# Altium PCB Controller R2.PcbDoc (part 1 of 3)
Units mil, origin at the board's own origin, x right, y up, seen from the top; angles counter-clockwise.
Board outline 3149.61 x 3149.61 mil, 4 copper layers (Top Layer, Inner 1, Inner 2, Bottom Layer), stack 70.112 mil thick; 128 components, 120 nets, 594 pads, 1557 vias.
Unrouted connection lines stored in the file: 130.
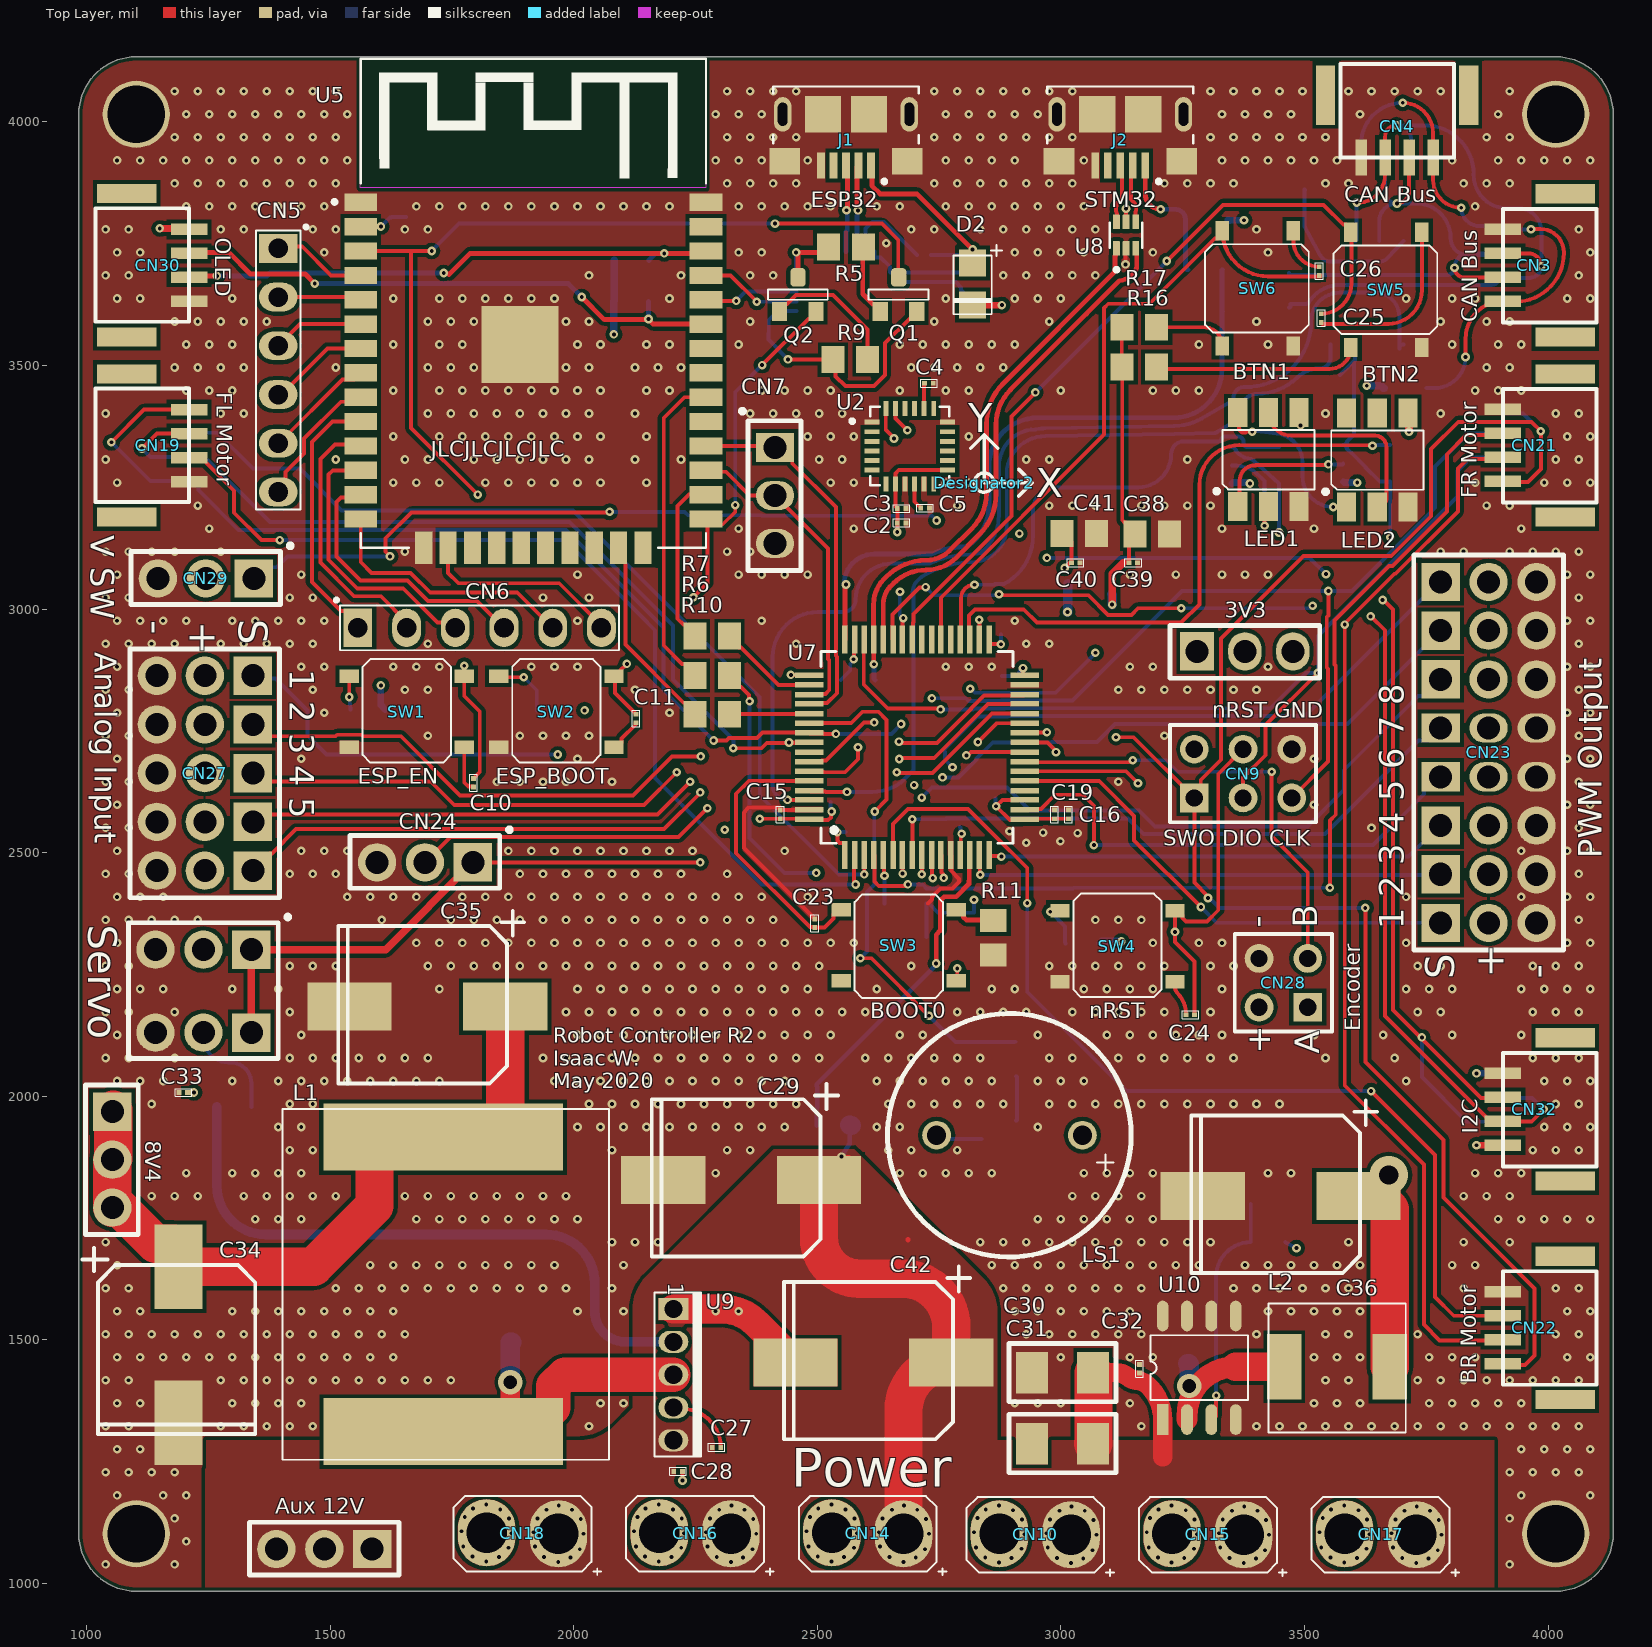
[diagram p0: Top Layer view]
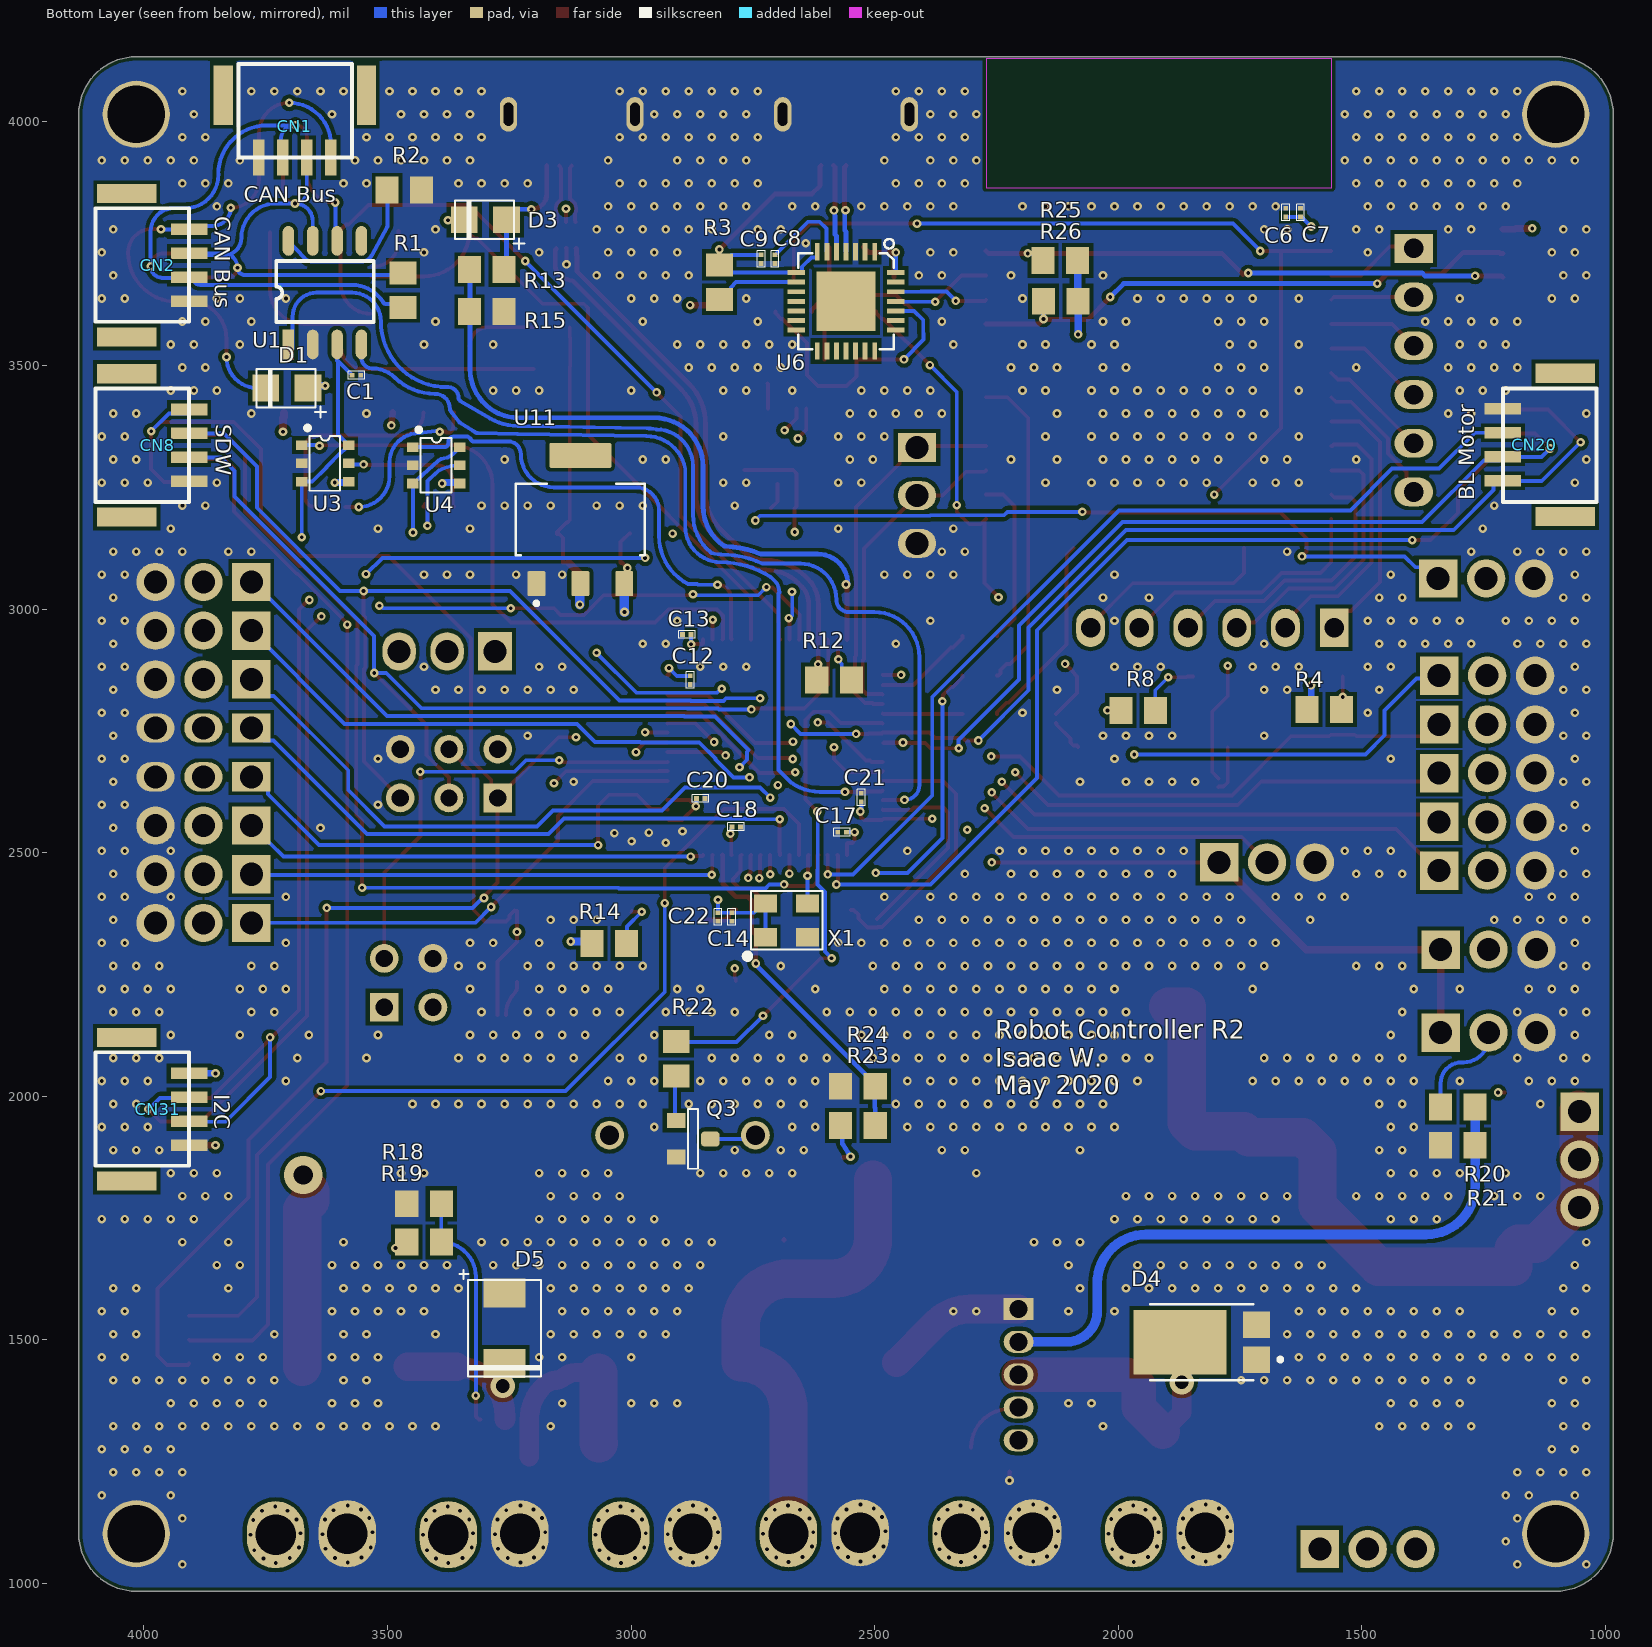
[diagram p1: Bottom Layer view, seen from below]
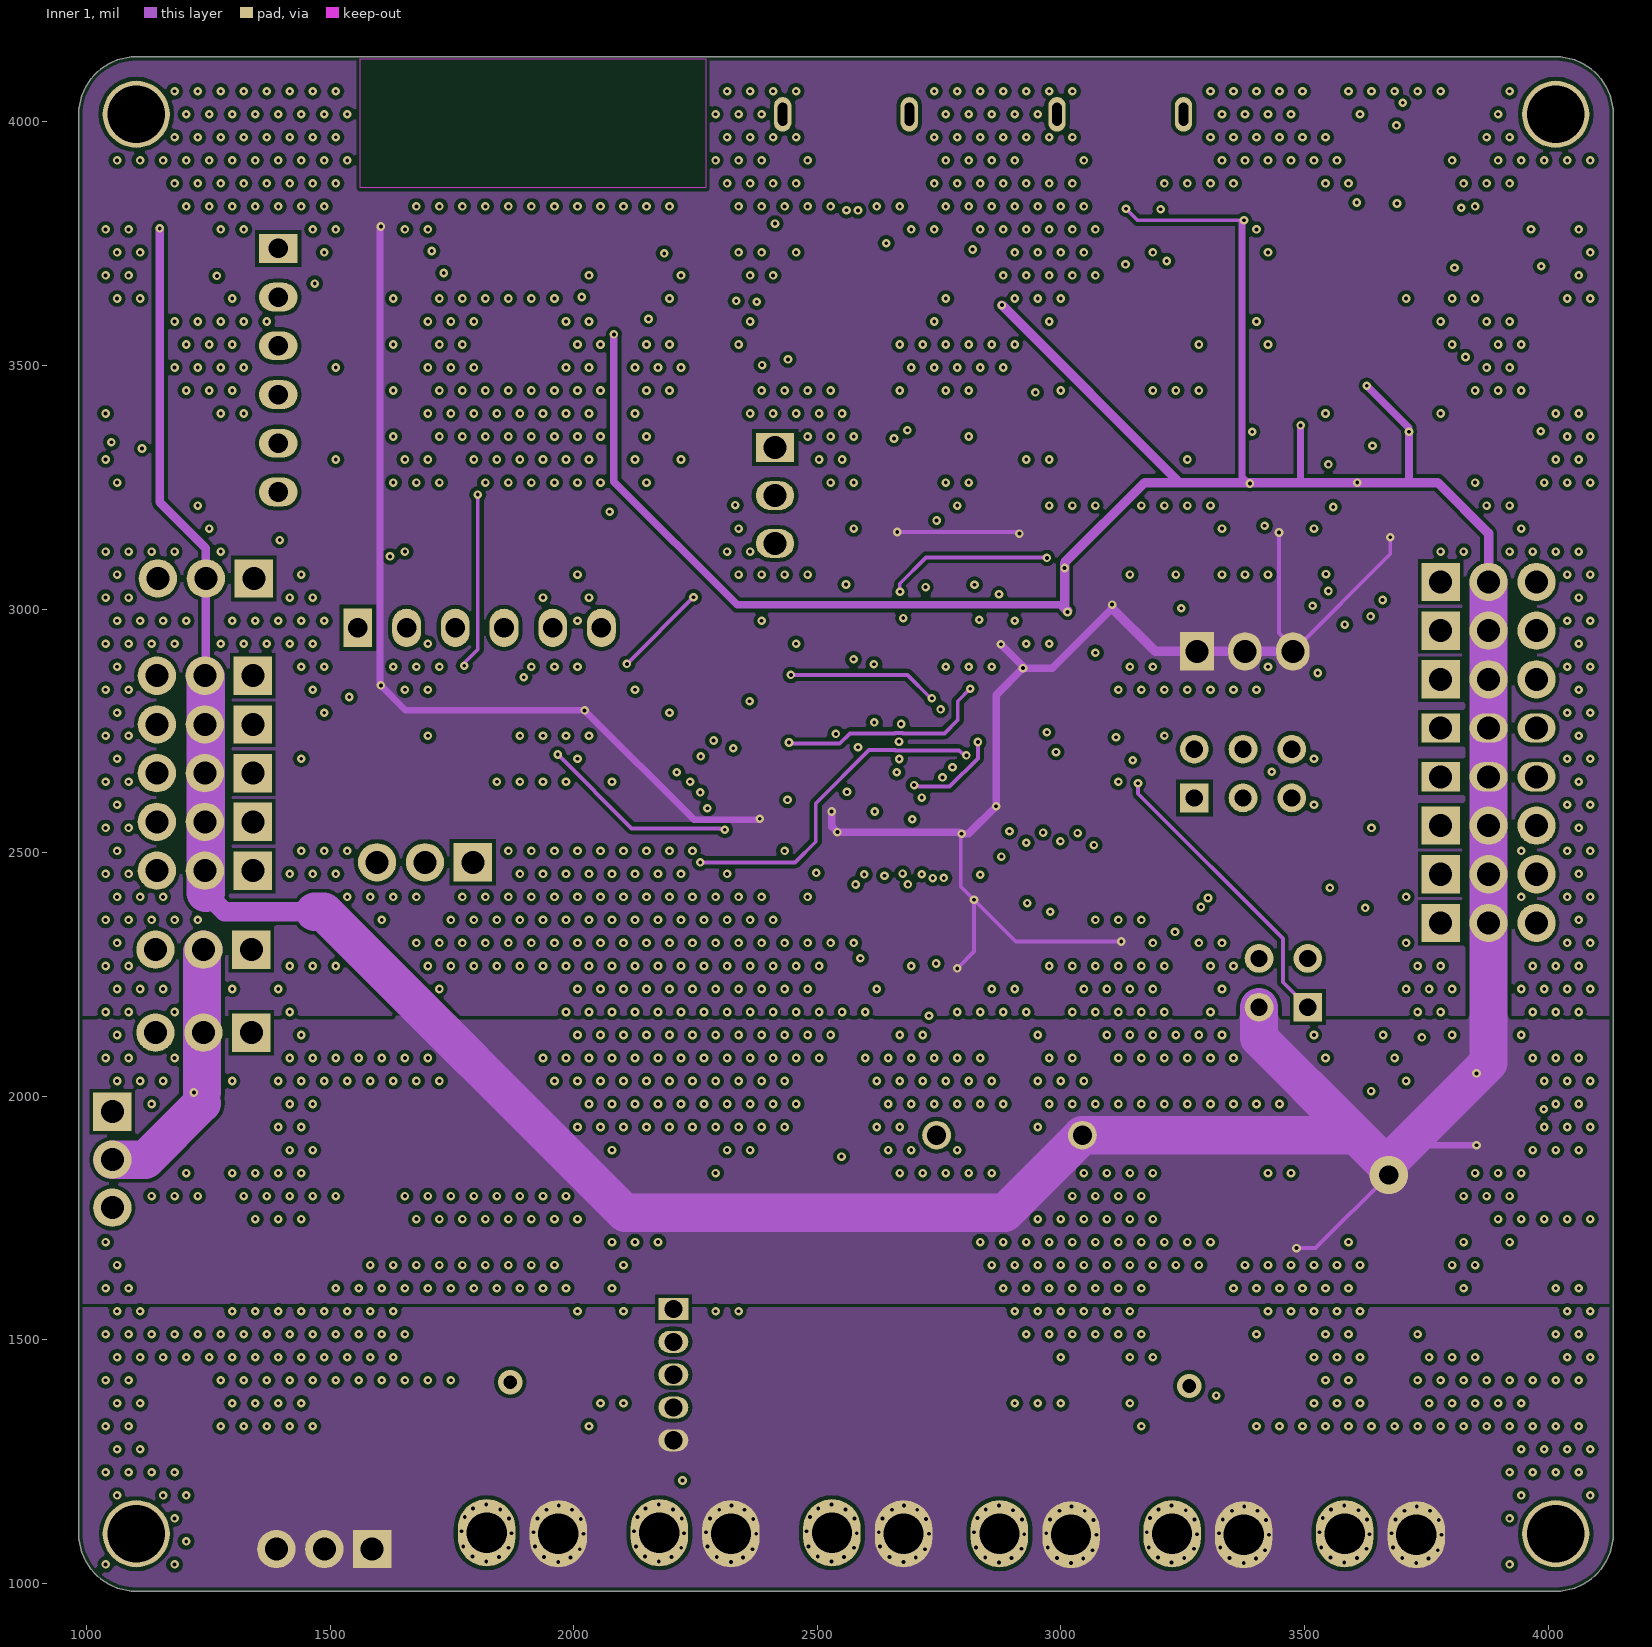
[diagram p2: Inner 1]
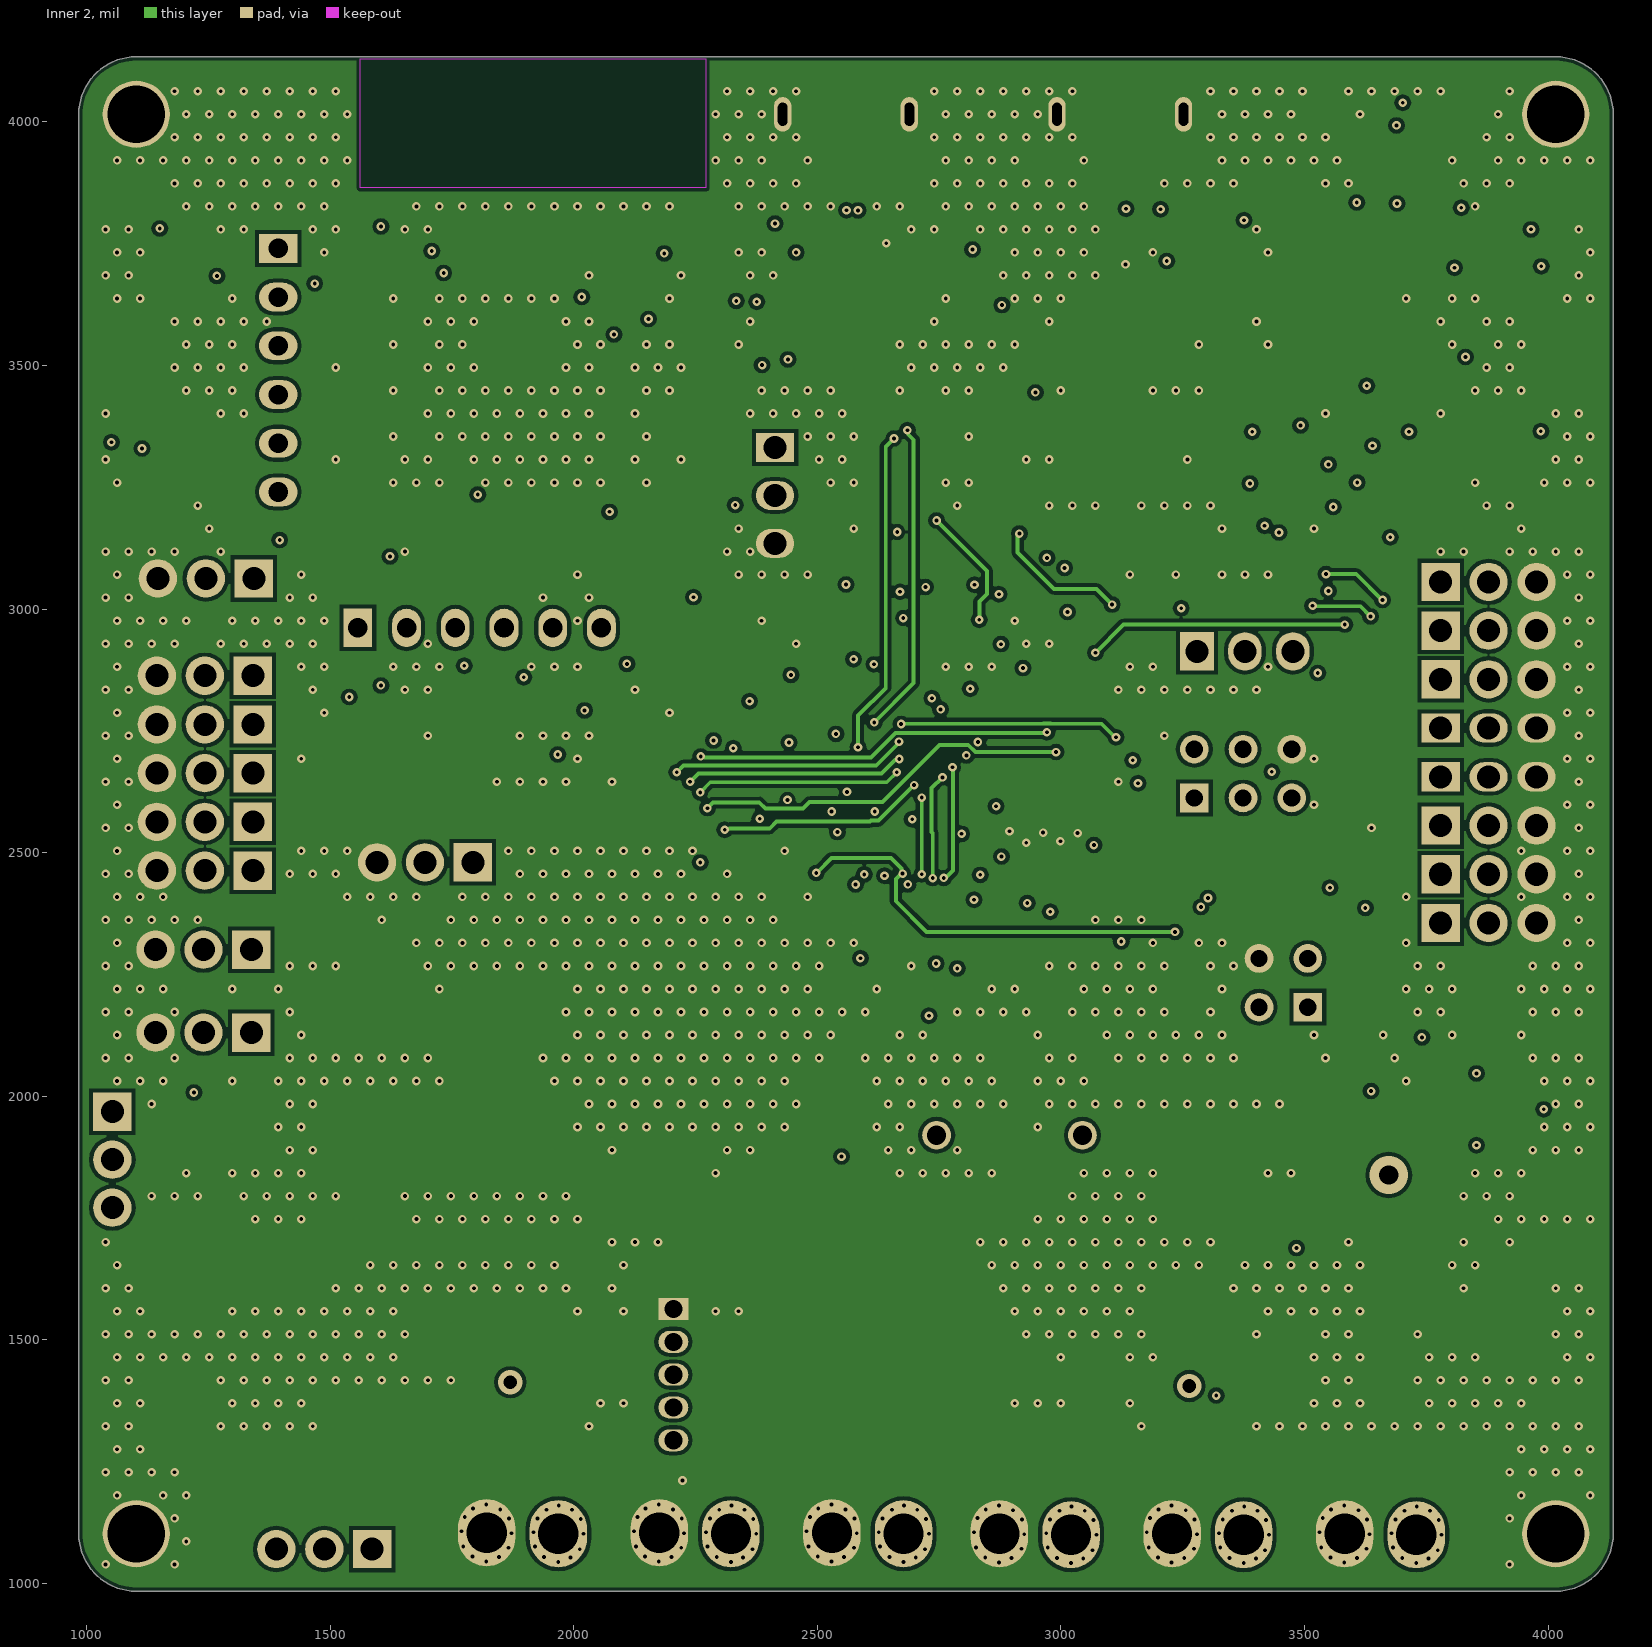
[diagram p3: Inner 2]

## Layer stack, top to bottom
Top Solder: solder mask 1, SM-001, Dk 4
Top Layer: signal copper 1.378
Dielectric 2: prepreg 2.8, PP-006, Dk 4.1
Inner 1: signal copper 1.378
Dielectric 1: core 59, Core-043, Dk 4.3
Inner 2: signal copper 1.378
Dielectric 3: prepreg 2.8, PP-006, Dk 4.1
Bottom Layer: signal copper 1.378
Bottom Solder: solder mask 1, SM-001, Dk 4

## Board outline
984.25,1102.36 984.25,4015.75 cw(c1102.36,4015.75) 1102.36,4133.86 4015.75,4133.86 cw(c4015.75,4015.75) 4133.86,4015.75 4133.86,1102.36 cw(c4015.75,1102.36) 4015.75,984.25 1102.36,984.25 cw(c1102.36,1102.36)

## Design rules (kind name [scope] priority, off if disabled: settings)
BoardOutlineClearance [All] p1: gap=7.87 ignorepadtopadclearanceinfootprint=FALSE except(15.75: Arc-SplitBarrior Arc-SplitContinuation Track-SplitBarrior Track-SplitContinuation SMDPad-SplitBarrior SMDPad-SplitContinuation THPad-SplitBarrior THPad-SplitContinuation Via-SplitBarrior Via-SplitContinuation Fill-SplitBarrior Fill-SplitContinuation Poly-SplitBarrior Poly-SplitContinuation Region-SplitBarrior Region-SplitContinuation Text-SplitBarrior Text-SplitContinuation)
Clearance "Clearance Bottom Layer" [OnLayer('Bottom Layer')] p1: gap=8 ignorepadtopadclearanceinfootprint=TRUE except(10: Arc-Text Track-Text SMDPad-Text THPad-Text Via-Text Fill-Text Poly-Text Region-Text Text-Text)
Clearance "Clearance Top Layer" [OnLayer('Top Layer')] p2: gap=8 ignorepadtopadclearanceinfootprint=TRUE except(10: Arc-Text Track-Text SMDPad-Text THPad-Text Via-Text Fill-Text Poly-Text Region-Text Text-Text)
Clearance [All] p3: gap=7.87 ignorepadtopadclearanceinfootprint=FALSE except(3.5: Arc-Arc Arc-Track Arc-SMDPad Track-Track Track-SMDPad SMDPad-SMDPad; 5: Arc-Via Track-Via SMDPad-Via THPad-Via Via-Via; 10: Arc-Text Track-Text SMDPad-Text THPad-Text Via-Text Fill-Text Poly-Text Region-Text Text-Text)
DiffPairsRouting [All] p1: maxlimit=10 minlimit=8 mostfreqgap=10 toplayer_minwidth=7.99 toplayer_maxwidth=15 toplayer_prefwidth=8.27 midlayer1_minwidth=7.99 midlayer1_maxwidth=15 midlayer1_prefwidth=8.27 midlayer2_minwidth=7.99 midlayer2_maxwidth=15 midlayer2_prefwidth=8.27 bottomlayer_minwidth=7.99 bottomlayer_maxwidth=15 bottomlayer_prefwidth=8.27 maxuncoupledlength=500
HoleSize [All] p1: absolutevalues=TRUE maxlimit=248.03 minlimit=7.87 maxpercent=80.000 minpercent=20.000
MinimumAnnularRing [All] p1: minimumring=3
MinimumSolderMaskSliver [All] p1: minsoldermaskwidth=3.94
PlaneConnect [All] p1: planeconnectstyle=Direct reliefexpansion=20 reliefentries=4 reliefconductorwidth=10 reliefairgap=10
PolygonConnect PolygonConnect_1 [All] p1: connectstyle=Direct reliefconductorwidth=20 reliefentries=4 polygonreliefangle="90 Angle" airgapwidth=10
RoutingCorners [All] p1: cornerstyle=Round minsetback=100 maxsetback=100
RoutingVias [All] p1: holewidth=19.68 width=39.37 viastyle="Through Hole" minholewidth=7.87 minwidth=17.72 maxholewidth=39.37 maxwidth=78.74
SilkToSilkClearance [All] p1: silktosilkclearance=3.94
SilkToSolderMaskClearance [IsPad] p1: minsilkscreentomaskgap=3.94 clearancetoexposedcopper=TRUE
SolderMaskExpansion [All] p1: expansion=4 istentingtop=FALSE
Width [All] p1: maxlimit=196.85 minlimit=8 preferedwidth=9.84
23 further rules are at their usual default settings.

## Classes and differential pairs
component class U_Power: C27 C28 C29 C30 C31 C32 C33 C34 C35 C36 C38 C39 C40 C41 C42 CN10 CN14 CN15 CN16 CN17 CN18 D4 D5 L1 L2 R18 R19 R20 U9 U10 U11
component class U_MCU: C6 C7 C8 C9 C10 C11 C12 C13 C14 C15 C16 C17 C18 C19 C20 C21 C22 C23 C24 C25 C26 CN5 CN6 CN7 CN8 CN9 D2 D3 J1 J2 Q1 Q2 R3 R4 R5 R6 R7 R8 R9 R10 R11 R12 R13 R14 R15 R16 R17 SW1 SW2 SW3 SW4 SW5 SW6 U5 U6 U7 U8 X1
component class U_LED: LED1 LED2 U3 U4
component class U_IMU: C2 C3 C4 C5 U2
component class U_CAN: C1 CN1 CN2 CN3 CN4 D1 R1 R2 U1
component class "Controller R2": CN19 CN20 CN21 CN22 CN23 CN24 CN27 CN28 CN29 CN30 CN31 CN32 LS1 Q3 R22 R23 R24
differential pair USB: +USB_P -USB_N
differential pair NO_ESD: +NO_ESD_P -NO_ESD_N
differential pair ESP_USB: +ESP_USB_P -ESP_USB_N

## Components (designator, comment, footprint, x,y, rotation, side; value= is the part's Value field where it differs from the comment)
C1 "Cap" 0402 3563.98,3480.32 r0 bottom locked value=100nF
C2 "Cap" 0402 2673.23,3177.17 r180 top locked value=1uF
C3 "Cap" 0402 2673.23,3206.69 r180 top locked value=100nF
C4 "Cap" 0402 2729.33,3463.58 r180 top locked value=2.2nF
C5 "Cap" 0402 2721.46,3207.68 r180 top locked value=100nF
C6 "ESP32_P1" 0402 1656.5,3813.98 r270 bottom locked value=1uF
C7 "ESP32_P1" 0402 1625.98,3813.98 r270 bottom locked value=100nF
C8 "P6" 0402 2704.72,3718.5 r90 bottom locked value=100nF
C9 "P7" 0402 2733.27,3718.5 r90 bottom locked value=100nF
C10 "Cap" 0402 1794.29,2643.7 r90 top locked value=100nF
C11 "Cap" 0402 2127.95,2775.59 r90 top locked value=100nF
C12 "Pin 32" 0402 2878.94,2854.33 r90 bottom locked value=100nF
C13 "Pin 33" 0402 2885.83,2947.83 r180 bottom locked value=100nF
C14 "XO" 0402 2793.31,2368.11 r90 bottom locked value=100nF
C15 "" 0402 2424.21,2578.74 r270 top locked value=1uF
C16 "" 0402 3015.75,2578.74 r270 top value=1uF
C17 "Pin 1" 0402 2566.93,2542.32 r180 bottom locked value=100nF
C18 "Pin 13" 0402 2784.45,2553.15 r0 bottom locked value=100nF
C19 "Pin 17" 0402 2987.2,2578.74 r270 top value=100nF
C20 "Pin 19" 0402 2857.28,2611.22 r0 bottom value=100nF
C21 "Pin 64" 0402 2527.56,2613.19 r270 bottom locked value=100nF
C22 "XO" 0402 2821.85,2368.11 r90 bottom locked value=10nF
C23 "Cap" 0402 2495.08,2355.31 r90 top locked value=100nF
C24 "Cap" 0402 3265.75,2167.32 r0 top locked value=100nF
C25 "Cap" 0402 3534.45,3597.44 r90 top locked value=100nF
C26 "Cap" 0402 3530.51,3693.9 r270 top locked value=100nF
C27 "Cap" 0402 2293.31,1279.53 r180 top locked value=1uF
C28 "Cap" 0402 2214.57,1230.32 r180 top locked value=1uF
C29 "470uF" 10x12mm-Electrolytic 2333.66,1828.74 r0 top locked
C30 "Cap" 1206 3003.44,1433.07 r0 top locked value=47uF
C31 "Cap" 1206 3003.44,1287.4 r0 top locked value=47uF
C32 "Cap" 0402 3161.42,1440.94 r270 top locked value=100nF
C33 "Cap" 0402 1198.82,2007.87 r0 top locked value=1uF
C34 "470uF" 10x12mm-Electrolytic 1188.98,1480.32 r90 top locked
C35 "470uF" 10x12mm-Electrolytic 1689.96,2184.06 r0 top locked
C36 "100uF" 10x12mm-Electrolytic 3440.94,1795.28 r0 top locked
C38 "Cap" "0805 - duplicate" 3187.99,3154.53 r180 top locked value=4.7uF
C39 "Cap" 0402 3148.62,3095.47 r180 top locked value=100nF
C40 "Cap" 0402 3030.51,3095.47 r180 top locked value=100nF
C41 "Cap" "0805 - duplicate" 3037.4,3155.51 r180 top locked value=4.7uF
C42 "470uF" 10x12mm-Electrolytic 2605.32,1453.74 r0 top locked
CN1 "JST_GH-4P" JST_GH-4P 3764.31,3927.12 r90 bottom locked
CN2 "JST_GH-4P" JST_GH-4P 3907.44,3631.89 r0 bottom locked
CN3 "JST_GH-4P" JST_GH-4P 3907.44,3779.53 r0 top locked
CN4 "JST_GH-4P" JST_GH-4P 3616.31,3927.12 r90 top locked
CN5 "6P-2.5mm" 6-Pin-Header 1393.7,3740.55 r0 top locked
CN6 "6P-2.5mm" 6-Pin-Header 1557.09,2961.61 r90 top locked
CN7 "3P-2.5mm" 2.5mm-3P#1 2413.39,3331.69 r0 top locked
CN8 "JST_GH-4P" JST_GH-4P 3907.44,3262.2 r0 bottom locked
CN9 "SWD" HDR2X3_CEN 3274.02,2612.6 r0 top locked
CN10 "Power In" Power_Leads 2974.02,1102.36 r180 top locked
CN14 "JST_Leads_In" Power_Leads 2630.17,1104.36 r180 top locked
CN15 "JST_Leads_In" Power_Leads 3328.35,1102.36 r180 top locked
CN16 "JST_Leads_In" Power_Leads 2275.83,1104.36 r180 top locked
CN17 "JST_Leads_In" Power_Leads 3682.68,1102.36 r180 top locked
CN18 "JST_Leads_In" Power_Leads 1921.5,1104.36 r180 top locked
CN19 "JST_GH-4P" JST_GH-4P 1210.67,3261.98 r180 top locked
CN20 "JST_GH-4P" JST_GH-4P 1210.68,3411.25 r180 bottom locked
CN21 "JST_GH-4P" JST_GH-4P 3907.44,3409.98 r0 top locked
CN22 "JST_GH-4P" JST_GH-4P 3907.43,1598.95 r0 top locked
CN23 "8P-Signal-2.5mm" 8ch-signal-header 3779.53,2355.91 r90 top locked
CN24 "3P-2.5mm" 2.5mm-3P#2 1793.31,2480.32 r270 top locked
CN27 "5P-Signal-2.5mm" 5ch-signal-header 1341.54,2863.39 r270 top locked
CN28 "Header 2X2" HDR2X2 3506.89,2183.07 r90 top locked
CN29 "3P-2.5mm" 2.5mm-3P#2 1343.5,3062.99 r270 top locked
CN30 "JST_GH-4P" JST_GH-4P 1210.67,3631.89 r180 top locked
CN31 "JST_GH-4P" JST_GH-4P 3907.44,1899.61 r0 bottom locked
CN32 "JST_GH-4P" JST_GH-4P 3907.44,2047.24 r0 top locked
D1 "SS12F" SMAF_DIODE 3706.69,3453.74 r0 bottom locked
D2 "SS12F" SMAF_DIODE 2818.9,3667.32 r270 top locked
D3 "SS12F" SMAF_DIODE 3299.21,3799.21 r0 bottom locked
D4 "Diode" PowerDi5 1828.98,1495.28 r90 bottom locked
D5 "SS24" DO-214AA 3259.84,1524.04 r90 bottom locked
Designator2 "Comment" XY_Arrow 2842.52,3259.84 r0 top locked
J1 "10118193-0001LF" FCI_10118193-0001LF 2559.06,4015.75 r180 top locked
J2 "10118193-0001LF" FCI_10118193-0001LF 3122.05,4015.75 r180 top locked
L1 "47uH 8A" 18x16-9-Inductor 1732.28,1614.17 r90 top locked
L2 "22uH" 71x66-Inductor 3566.93,1444.88 r0 top locked
LED1 "APA102C" 5x5_WS2812 3363.19,3210.63 r90 top locked
LED2 "APA102C" 5x5_WS2812 3586.61,3209.65 r90 top locked
LS1 "Buzzer" 12-dia-buzzer 3044.29,1920.28 r180 top locked
Q1 "S8050" SOT23-FET 2629.32,3611.1 r90 top locked
Q2 "S8050" SOT23-FET 2422.63,3611.1 r90 top locked
Q3 "S8050" SOT23-FET 2907.6,1950.4 r180 bottom locked
R1 "120" "0805 - duplicate" 3468.5,3654.53 r90 bottom locked
R2 "100" "0805 - duplicate" 3465.55,3860.24 r0 bottom locked
R3 "10k" "0805 - duplicate" 2818.9,3671.26 r270 bottom locked
R4 "10k" "0805 - duplicate" 1577.76,2794.29 r180 bottom locked
R5 "10k" "0805 - duplicate" 2559.06,3743.11 r0 top locked
R6 "0R" "0805 - duplicate" 2284.45,2864.17 r0 top locked
R7 "1k" "0805 - duplicate" 2284.45,2944.88 r0 top locked
R8 "10k" "0805 - duplicate" 1959.65,2792.32 r180 bottom locked
R9 "10k" "0805 - duplicate" 2567.91,3512.8 r0 top locked
R10 "1k" "0805 - duplicate" 2284.45,2784.45 r0 top locked
R11 "10k" "0805 - duplicate" 2861.22,2325.79 r90 top locked
R12 "1.5k" "0805 - duplicate" 2583.66,2854.33 r0 bottom locked
R13 "10k" "0805 - duplicate" 3296.26,3696.85 r180 bottom locked
R14 "10k" "0805 - duplicate" 3045.28,2313.98 r180 bottom locked
R15 "15k" "0805 - duplicate" 3296.26,3611.22 r0 bottom locked
R16 "10k" "0805 - duplicate" 3161.42,3497.05 r0 top locked
R17 "10k" "0805 - duplicate" 3161.42,3578.74 r0 top locked
R18 "3.3k" "0805 - duplicate" 3425.2,1779.53 r0 bottom locked
R19 "10k" "0805 - duplicate" 3425.2,1700.79 r0 bottom locked
R20 "10k" "0805 - duplicate" 1303.15,1978.35 r0 bottom locked
R21 "1.74k" "0805 - duplicate" 1303.15,1899.61 r180 bottom locked
R22 "1.5k" "0805 - duplicate" 2907.48,2076.77 r90 bottom locked
R23 "5k" "0805 - duplicate" 2534.45,1939.96 r180 bottom locked
R24 "1k" "0805 - duplicate" 2534.45,2020.67 r0 bottom locked
R25 "1.2k" "0805 - duplicate" 2119.09,3715.55 r180 bottom locked
R26 "1.2k" "0805 - duplicate" 2118.11,3631.89 r180 bottom locked
SW1 "SPST Switch" 4.8x4.8-SMD-SWITCH 1539.37,2862.2 r0 top locked
SW2 "SPST Switch" 4.8x4.8-SMD-SWITCH 1846.46,2862.2 r0 top locked
SW3 "SPST Switch" 4.8x4.8-SMD-SWITCH 2785.43,2237.2 r180 top locked
SW4 "SPST Switch" 4.8x4.8-SMD-SWITCH 2998.03,2380.91 r0 top locked
SW5 "USR_BTN2" 4.8x4.8-SMD-SWITCH 3595.47,3537.4 r90 top locked
SW6 "USR_BTN1" 4.8x4.8-SMD-SWITCH 3331.69,3540.35 r90 top locked
U1 "SN65HVD230" SOIC8-TI_CAN 3703.54,3543.31 r90 bottom locked
U2 "MPU-6050" QFN50P400X400X95-24N 2689.96,3334.65 r0 top locked
U3 "PI4ULS5V201" SOT23-PI4ULS5V201 3676.18,3336.61 r180 bottom locked
U4 "PI4ULS5V201" SOT23-PI4ULS5V201 3447.83,3332.68 r180 bottom locked
U5 "ESP-WROOM-32" ESP-WROOM-32 1917.32,3510.04 r0 top locked
U6 "CP2102-GMR" QFN28G_0.5-5X5MM 2559.06,3631.89 r270 bottom locked
U7 "STM32F373RCTx" LQFP64 2704.72,2716.54 r90 top locked
U8 "USBLC6-2P6" SOT50P160X60-6N 3133.86,3767.72 r90 top locked
U9 "XL4016" TO220-5L 2204.72,1563.39 r0 top locked
U10 "XL1509-ADJ" SOP8-MT3420 3209.06,1336.61 r90 top locked
U11 "AMS1117-3.3" SOT229P700X180-4N 3104.33,3184.06 r180 bottom locked
X1 "8MHz 3225 SMD Oscillator" "3.2x2.5 SMD" 2724.41,2395.67 r180 bottom locked

## Footprints (in the part's own frame and the unit in brackets; to place one, negate y for a bottom-side part, rotate by r counter-clockwise, add the part's x,y. Pads: shape width x height; smd on the part's side, far side on the other; paste and mask are expansions set on the pad)
2.5mm-3P#1 [mm]
  rect 2x1.5 hole 1.2: 1(0,0)
  oval 2x1.5 hole 1.2: 2(0,-2.5) 3(0,-5)
  silkscreen extent -1.8,-6.4 1.35,2
2.5mm-3P#2 [mm]
  rect 2x2 hole 1.2: 1(0,0)
  round 2 hole 1.2: 2(0,-2.5) 3(0,-5)
  silkscreen extent -1.8,-6.4 1.35,2
"3.2x2.5 SMD" [mm]
  rect 1.2x0.95 smd: 1(0,-1.75) 2(2.2,-1.75) 3(2.2,0) 4(0,0)
  silkscreen extent -1.11,-2.91 2.97,0.66
4.8x4.8-SMD-SWITCH [mm]
  rect 1x0.7 smd: 1(0,0) 2(6,0) 3(0,-3.7) 4(6,-3.7)
  silkscreen extent 0.7,-4.5 5.3,0.9
5ch-signal-header [mm]
  rect 2x2 hole 1.2: 1(0,0) 2(2.54,0) 3(5.08,0) 4(7.62,0) 5(10.16,0)
  round 2 hole 1.2: N(0,-5) N(2.54,-5) N(5.08,-5) N(7.62,-5) N(10.16,-5) P(0,-2.5) P(2.54,-2.5) P(5.08,-2.5) P(7.62,-2.5) P(10.16,-2.5)
  silkscreen extent -1.4,-6.4 11.58,1.4
5x5_WS2812 [mm]
  rect 1.5x1 smd: 1(0,0) 2(0,-1.6) 3(0,-3.2) 4(4.9,-3.2) 5(4.9,-1.6) 6(4.9,0)
  silkscreen extent 0.7,-4 4,1.2
6-Pin-Header [mm]
  rect 2x1.5 hole 1.02: 1(0,0)
  oval 2x1.5 hole 1.02: 2(0,-2.54) 3(0,-5.08) 4(0,-7.62) 5(0,-10.16) 6(0,-12.7)
  silkscreen extent -1.17,-13.61 1.5,1.17
8ch-signal-header [mm]
  rect 2x2 hole 1.2: 1(0,0) 2(2.54,0) 3(5.08,0) 6(12.7,0) 7(15.24,0) 8(17.78,0)
  rect 1.524x2 hole 1.2: 4(7.62,0) 5(10.16,0)
  round 2 hole 1.2: N(0,-5) N(2.54,-5) N(5.08,-5) N(12.7,-5) N(15.24,-5) N(17.78,-5) P(0,-2.5) P(2.54,-2.5) P(5.08,-2.5) P(12.7,-2.5) P(15.24,-2.5) P(17.78,-2.5)
  oval 1.524x2 hole 1.2: N(7.62,-5) N(10.16,-5) P(7.62,-2.5) P(10.16,-2.5)
  silkscreen extent -1.4,-6.4 19.18,1.4
10x12mm-Electrolytic [mm]
  rect 4.4x2.5 smd: 1(4.318,0) 2(-3.81,0)
  silkscreen extent -4.4,-4 5.3,5
12-dia-buzzer [mm]
  round 1.5 hole 1: A(0,0) K(7.6,0)
  silkscreen extent -2.54,-6.35 10.16,6.35
18x16-9-Inductor [mm]
  rect 3.5x12.5 smd: 1(-7.675,0) 2(7.675,0)
  silkscreen extent -9.14,-8.64 9.14,8.38
71x66-Inductor [mm]
  rect 1.8x3.4 smd: 1(-2.75,0) 2(2.75,0)
  silkscreen extent -3.58,-3.43 3.58,3.3
0402 [mm]
  rect 0.25x0.25 smd mask+0.05: 1(-0.225,0) 2(0.225,0)
  silkscreen extent -0.43,-0.2 0.43,0.2
"0805 - duplicate" [mm] "Chip Resistor, Body 2.0x1.2mm, IPC Medium Density"
  rect 1.2x1.4 smd: 1(-0.9,0) 2(0.9,0)
  body extent -1.07,-0.7 1.07,0.7, height 0.7
1206 [mil]
  rect 65x85 smd: 1(-62.5,0) 2(62.5,0)
  silkscreen extent -110,-60 110,60
DO-214AA [mm]
  rect 1.52x2.18 smd: A(1.84,0) K(-1.839,0)
  silkscreen extent -2.51,-1.91 3.05,2.36
ESP-WROOM-32 [mm]
  rect 1.7x0.9 smd: 1(-9,8.255) 2(-9,6.985) 3(-9,5.715) 4(-9,4.445) 5(-9,3.175) 6(-9,1.905) 7(-9,0.635) 8(-9,-0.635) 9(-9,-1.905) 10(-9,-3.175) 11(-9,-4.445) 12(-9,-5.715) 13(-9,-6.985) 14(-9,-8.255) 25(9,-8.255) 26(9,-6.985) 27(9,-5.715) 28(9,-4.445) 29(9,-3.175) 30(9,-1.905) 31(9,-0.635) 32(9,0.635) 33(9,1.905) 34(9,3.175) 35(9,4.445) 36(9,5.715) 37(9,6.985) 38(9,8.255)
  rect 4x4 smd: 1(-0.7,0.845)
  rect 0.9x1.7 smd: 15(-5.715,-9.755) 16(-4.445,-9.755) 17(-3.175,-9.755) 18(-1.905,-9.755) 19(-0.635,-9.755) 20(0.635,-9.755) 21(1.905,-9.755) 22(3.175,-9.755) 23(4.445,-9.755) 24(5.715,-9.755)
  Keep-Out Layer region: -9.026,15.75 9,15.75 9,9.026 -9.026,9.026
  Keep-Out Layer region: -9.012,15.75 9,15.75 9,9.012 -9.012,9.012
  Keep-Out Layer region: -9.024,15.75 9,15.75 9,9.024 -9.024,9.024
  Keep-Out Layer region: -9.026,15.75 9,15.75 9,9.026 -9.026,9.026
  Keep-Out Layer region: -9.012,15.75 9,15.75 9,9.012 -9.012,9.012
  Keep-Out Layer region: -9.024,15.75 9,15.75 9,9.024 -9.024,9.024
  Keep-Out Layer region: -9.026,15.75 9,15.75 9,9.026 -9.026,9.026
  Keep-Out Layer region: -9.012,15.75 9,15.75 9,9.012 -9.012,9.012
  Keep-Out Layer region: -9.024,15.75 9,15.75 9,9.024 -9.024,9.024
  silkscreen extent -10.46,-9.75 9,15.75
FCI_10118193-0001LF [mm]
  rect 0.4x1.35 smd: 1(-1.3,2.675) 2(-0.65,2.675) 3(0,2.675) 4(0.65,2.675) 5(1.3,2.675)
  oval 0.9x1.8 hole 0.5 slot 1.2 at 90 deg: S(-3.3,0) S(3.3,0)
  rect 1.6x1.4 smd: S(-3.2,2.45) S(3.2,2.45)
  rect 1.9x1.9 smd: S(-1.2,0) S(1.2,0)
  silkscreen extent -3.8,-1.45 3.8,3.6
HDR2X2 [mm] "Connector; Header; 2x2 Position"
  rect 1.5x1.5 hole 0.9: 1(0,0)
  round 1.5 hole 0.9: 2(0,2.54) 3(2.54,0) 4(2.54,2.54)
  silkscreen extent -1.27,-1.27 3.81,3.81
HDR2X3_CEN [mm] "Connector; Header; 3x2 Position"
  rect 1.5x1.5 hole 0.9: 1(0,0)
  round 1.5 hole 0.9: 2(2.54,0) 3(5.08,0) 4(0,2.54) 5(2.54,2.54) 6(5.08,2.54)
  silkscreen extent -1.27,-1.27 6.35,3.81
JST_GH-4P [mm]
  rect 1.9x0.6 smd: 1(0,-3.75) 2(0,-2.5) 3(0,-1.25) 4(0,0)
  rect 3.1x1 smd: 5(3.251,-5.613) 5(3.251,1.854)
  silkscreen extent 0,-4.85 4.88,1.07
LQFP64 [mil]
  rect 58x11 smd: 1(-221,148) 2(-221,128) 3(-221,108) 4(-221,89) 5(-221,69) 6(-221,49) 7(-221,30) 8(-221,10) 9(-221,-10) 10(-221,-30) 11(-221,-49) 12(-221,-69) 13(-221,-89) 14(-221,-108) 15(-221,-128) 16(-221,-148) 33(221,-148) 34(221,-128) 35(221,-108) 36(221,-89) 37(221,-69) 38(221,-49) 39(221,-30) 40(221,-10) 41(221,10) 42(221,30) 43(221,49) 44(221,69) 45(221,89) 46(221,108) 47(221,128) 48(221,148)
  rect 11x58 smd: 17(-148,-221) 18(-128,-221) 19(-108,-221) 20(-89,-221) 21(-69,-221) 22(-49,-221) 23(-30,-221) 24(-10,-221) 25(10,-221) 26(30,-221) 27(49,-221) 28(69,-221) 29(89,-221) 30(108,-221) 31(128,-221) 32(148,-221) 49(148,221) 50(128,221) 51(108,221) 52(89,221) 53(69,221) 54(49,221) 55(30,221) 56(10,221) 57(-10,221) 58(-30,221) 59(-49,221) 60(-69,221) 61(-89,221) 62(-108,221) 63(-128,221) 64(-148,221)
  silkscreen extent -197,-197 197,197
Power_Leads [mm]
  oval 3x3.5 hole 2.1: A(-1.194,0.051) K(2.54,0)
  silkscreen extent -3.43,-1.91 4.27,2.21
PowerDi5 [mm]
  rect 1.39x1.4 smd: 1(-0.92,-2.856) 2(0.92,-2.856)
  rect 3.36x4.86 smd: 3(0,1.126)
  silkscreen extent -1.98,-4.2 1.98,2.69
QFN28G_0.5-5X5MM [mm]
  rect 0.9x0.254 smd: 1(-2.59,1.5) 2(-2.59,1) 3(-2.59,0.5) 4(-2.59,0) 5(-2.59,-0.5) 6(-2.59,-1) 7(-2.59,-1.5) 15(2.59,-1.5) 16(2.59,-1) 17(2.59,-0.5) 18(2.59,0) 19(2.59,0.5) 20(2.59,1) 21(2.59,1.5)
  rect 0.254x0.9 smd: 8(-1.5,-2.59) 9(-1,-2.59) 10(-0.5,-2.59) 11(0,-2.59) 12(0.5,-2.59) 13(1,-2.59) 14(1.5,-2.59) 22(1.5,2.59) 23(1,2.59) 24(0.5,2.59) 25(0,2.59) 26(-0.5,2.59) 27(-1,2.59) 28(-1.5,2.59)
  rect 3.1x3.1 smd paste-3: 29(0,0)
  silkscreen extent -3.25,-2.5 2.5,2.5
QFN50P400X400X95-24N [mm]
  rect 0.79x0.26 smd mask+0.089: 1(-1.97,1.25) 2(-1.97,0.75) 3(-1.97,0.25) 4(-1.97,-0.25) 5(-1.97,-0.75) 6(-1.97,-1.25) 13(1.97,-1.25) 14(1.97,-0.75) 15(1.97,-0.25) 16(1.97,0.25) 17(1.97,0.75) 18(1.97,1.25)
  rect 0.26x0.79 smd mask+0.089: 7(-1.25,-1.97) 8(-0.75,-1.97) 9(-0.25,-1.97) 10(0.25,-1.97) 11(0.75,-1.97) 12(1.25,-1.97) 19(1.25,1.97) 20(0.75,1.97) 21(0.25,1.97) 22(-0.25,1.97) 23(-0.75,1.97) 24(-1.25,1.97)
  silkscreen extent -3.1,-2.05 2.05,2.05
SMAF_DIODE [mm]
  rect 1.4x1.4 smd: A(-1.1,0) K(1.1,0)
  silkscreen extent -2.03,-1 1.57,1.52
SOIC8-TI_CAN [mm]
  rect 1.55x0.6 smd: 1(0,0)
  oval 1.55x0.6 smd: 2(0,-1.27) 3(0,-2.54) 4(0,-3.81) 5(5.4,-3.81) 6(5.4,-2.54) 7(5.4,-1.27) 8(5.4,0)
  silkscreen extent 1.17,-4.44 4.34,0.63
SOP8-MT3420 [mm]
  rect 1.6x0.61 smd: 1(0,0)
  oval 1.6x0.61 smd: 2(0,-1.27) 3(0,-2.54) 4(0,-3.81) 5(5.4,-3.81) 6(5.4,-2.54) 7(5.4,-1.27) 8(5.4,0)
  silkscreen extent 1.02,-4.44 4.39,0.64
SOT23-FET [mil]
  rect 38.27x31.57 smd: 1(0,0) 2(0,-74.8)
  rrect50% 38.27x31.57 smd: 3(70,-38)
  silkscreen extent 24,-99 45,24
SOT23-PI4ULS5V201 [mm]
  rect 0.6x0.5 smd: 1(0,0) 2(0,-0.95) 3(0,-1.9) 4(2.45,-1.9) 5(2.45,-0.95) 6(2.45,0)
  silkscreen extent 0.2,-2.38 2,1
SOT50P160X60-6N [mm]
  rrect8% 0.75x0.35 smd: 1(-0.69,0.5) 2(-0.69,0) 3(-0.69,-0.5) 4(0.69,-0.5) 5(0.69,0) 6(0.69,0.5)
  silkscreen extent -1.9,-0.85 0.65,0.85
SOT229P700X180-4N [mm]
  rrect15% 0.93x1.31 smd: 1(-2.29,-3.345) 2(0,-3.345) 3(2.29,-3.345)
  rrect15% 3.24x1.31 smd: 4(0,3.345)
  silkscreen extent -3.36,-4.47 3.36,1.86
TO220-5L [mm]
  rect 1.56x1.15 hole 0.95: 1(0,0)
  oval 1.56x1.15 hole 0.95: 2(0,-1.71) 3(0,-3.42) 4(0,-5.13) 5(0,-6.84)
  silkscreen extent -0.99,-7.7 1.45,0.85
XY_Arrow [mil]
  silkscreen extent -28,-28 98,98

## Part data
C6 C7 C8 C9 C12 C13 C14 C15 C16 C17 C18 C19 C20 C21 C22: library part Cap, LatestRevisionDate=17-Jul-2002, LatestRevisionNote="Re-released for DXP Platform.", PackageDescription="Radial Cap, Thru-Hole; 2 Leads; 0.3 in Pin Spacing", PackageReference=RAD-0.3, Published=8-Jun-2000, Publisher="Altium Limited"
C29 C34 C35 C36 C42: library part "Polarised Capacitor"
CN9: library part "Header 3X2A", "Header, 3-Pin, Dual row", LatestRevisionDate=17-Jul-2002, LatestRevisionNote="Re-released for DXP Platform.", Publisher="Altium Limited"
CN10: library part JST_Leads_In
CN28: "Header, 2-Pin, Dual row", LatestRevisionDate=17-Jul-2002, LatestRevisionNote="Re-released for DXP Platform.", Publisher="Altium Limited"
D5: "2A Schottky Diode"
J1 J2: "USB - micro B USB 2.0 Receptacle Connector 5 Position Surface Mount, Right Angle; Through Hole", Package=None, Availability=Unavailable, MF="Amphenol ICC", MP=10118193-0001LF, Price=None, SnapEDA_Link=https://www.snapeda.com/parts/10118193-0001LF/Amphenol%20FCI/view-part/2758989/?ref=snap
L1: library part "SMD Inductor 18x16.9", "TMPC1707"
L2: library part "22uH Inductor, 7.1*6.6"
Q1 Q2 Q3: Package="TO-18-3 NJS", Digi-Key_Part_Number=1086-15156-ND, Digi-Key_Purchase_URL=https://www.digikey.com.mx/product-detail/en/microsemi-corporation/JANS2N2222A/1086-15156-ND/4384334?utm_source=snapeda&utm_medium=aggregator&utm_campaign=symbol, MF="MICROSS/On Semiconductor", MP=2N2222, SnapEDA_Link=https://www.snapeda.com/parts/2N2222/MICROSS/On%20Semiconductor/view-part/561967/?ref=snap
R1 R2 R3 R4 R5 R6 R7 R8 R9 R10 R11 R12 R13 R14 R15 R16 R17 R18 R19 R20 R21 R22 R23 R24 R25 R26: library part Resistor
SW5 SW6: library part "SPST Switch"
U1: "CAN Transceiver"
U2: "Accelerometer, Gyroscope, 6 Axis Sensor IÂ²C Output", Package="VFQFN-24 TDK InvenSense", Availability=Unavailable, MF="TDK InvenSense", MP=MPU-6050, Price=None, SnapEDA_Link=https://www.snapeda.com/parts/MPU-6050/TDK%20InvenSense/view-part/4503180/?ref=snap
U3 U4: "Level Translator"
U5: "WiFi 802.11b/g/n/d/e/i Transceiver Module 2.4GHz Surface Mount", Package="Module Olimex LTD", Availability=Unavailable, MF="Olimex LTD", MP=ESP-WROOM-32, Price=None, SnapEDA_Link=https://www.snapeda.com/parts/ESP-WROOM-32/Olimex%20LTD/view-part/2311927/?ref=snap
U8: "17V Clamp 5A _8/20µs_ Ipp Tvs Diode Surface Mount SOT-666", Package="SOT-563 STMicroelectronics", Availability=Unavailable, MF=STMicroelectronics, MP=USBLC6-2P6, Price=None, SnapEDA_Link=https://www.snapeda.com/parts/USBLC6-2P6/STMicroelectronics/view-part/106846/?ref=snap
U9: "8A Buck COnverter"
U10: library part XL1509-5
U11: "Sot223/Pkg 1-Amp 3.3-Volt Low Drop Out Voltage Regulatator", Package=None, Availability=Unavailable, MF="Advanced Monolithic Systems", MP=AMS1117-3.3, Price=None, SnapEDA_Link=https://www.snapeda.com/parts/AMS1117-3.3/Advanced%20Monolithic%20Systems/view-part/53450/?ref=snap
C1 C2 C3 C4 C5 C10 C11 C23 C24 C25 C26 C27 C28 C30 C31 C32 C33 C38 C39 C40 C41: LatestRevisionDate=17-Jul-2002, LatestRevisionNote="Re-released for DXP Platform.", PackageDescription="Radial Cap, Thru-Hole; 2 Leads; 0.3 in Pin Spacing", PackageReference=RAD-0.3, Published=8-Jun-2000, Publisher="Altium Limited"
D4: Code_JEDEC=DO-214-AB, LatestRevisionDate=17-Jul-2002, LatestRevisionNote="Re-released for DXP Platform.", PackageDescription="DO-214-AB/SMC; 2 C-Bend Leads; Body 7.9 x 5.9 mm, inc. leads (LxW)", PackageReference=SMC, PackageVersion=Sep-1996, Published=8-Jun-2000, Publisher="Altium Limited"

## Free pads (board coordinates)
  rect 78.74x78.74 hole 47.24: 1(1053.15,1968.5) 1(1338.58,2130.91) 1(1338.58,2301.18) 1(1586.61,1070.87)
  round 137.8 hole 118.11: 1(1102.36,4015.75) 2(4015.75,4015.75) 3(4015.75,1102.36) 4(1102.36,1102.36)
  rect 68.9x78.74 hole 47.24: 1(3279.53,2913.39)
  round 78.74 hole 47.24: 2(1053.15,1870.08) 2(1240.16,2130.91) 2(1240.16,2301.18) 2(1488.19,1070.87) 3(1053.15,1771.65) 3(1141.73,2130.91) 3(1141.73,2301.18) 3(1389.76,1070.87)
  oval 68.9x78.74 hole 47.24: 2(3377.95,2913.39) 3(3476.38,2913.39)

## Via types
v1: diameter 17.72/17.72/17.72/17.72 (per signal layer), hole 7.87, Top Layer to Bottom Layer, tented both sides, 1234 vias
v2: diameter 17.72, hole 7.87, Top Layer to Bottom Layer, tented both sides, 176 vias
v3: diameter 10.87, hole 7.87, Top Layer to Bottom Layer, 138 vias
v4: diameter 10.87, hole 7.87, Top Layer to Bottom Layer, tented both sides, 6 vias
v5: diameter 50, hole 28, Top Layer to Bottom Layer, tented both sides, 2 vias
v6: diameter 78.74, hole 39.37, Top Layer to Bottom Layer, tented both sides, 1 vias

## Nets (pads, with @x,y where several pads share a name; then routed paths per layer and width w, separated by ;. In a path a pad name is that pad's centre, name@x,y a point inside that pad or via, vN(x,y) a via of type N, cw(c..) or ccw(c..) an arc to the next point about the centre after c; other vN are vias at no path point)
3V3: C1.2 C2.2 C3.2 C6.2 C7.2 C12.2 C13.2 C14.2 C15.2 C16.2 C17.2 C18.2 C19.2 C20.2 C21.2 C22.2 C38.2 C39.2 pad.1@3279.53,2913.39 pad.2@3377.95,2913.39 pad.3@3476.38,2913.39 R4.1 R8.1 R14.1 R16.1 R17.1 SW3.1 U1.3 U2.8 U2.13 U3.3 U3.6 U4.3 U4.6 U5.2 U7.1 U7.13 U7.17 U7.19 U7.32 U7.33 U7.64 U11.2 X1.1 X1.4 | length 7678.4
  Top Layer w8: v2(2382.08,2569.88) U7.64@2482.38,2569.88 ; U7.64@2483.72,2568.54 2485.22,2567.04 2522.32,2567.04 2528.01,2572.72 2528.01,2583.07 v2(2529.58,2584.65) ; v2(2541.34,2542.32) 2541.34,2524.99 2546.02,2520.31 2555.22,2520.31 2556.72,2518.81 U7.1@2556.72,2495.54 ; v2(2664.37,3158.46) 2664.37,3166.34 C2.2@2664.37,3177.17 C3.2@2664.37,3206.69 2660.43,3210.63 U2.8@2660.43,3257.09 2660.43,3278.54 2667.32,3285.43 U2.13@2767.52,3285.43 ; SW3.1@2785.43,2237.2 2785.43,2241.14 2787.4,2243.11 v2(2787.4,2262.8) ; U7.13@2793.72,2495.54 2794.56,2496.37 2794.56,2537.04 v2(2796.4,2538.88) ; U7.33@2852.72,2937.54 2852.72,2929.65 2854.22,2928.15 v2(2876.97,2928.15) ; v2(2922.24,2878.94) 2922.24,2866.04 2923.74,2864.54 U7.32@2925.72,2864.54 ; U7.19@2925.72,2608.54 2880.19,2608.54 v2(2867.13,2595.47) 2895.67,2566.93 2922.24,2566.93 2925.2,2569.88 C19.2@2987.2,2569.88 C16.2@3015.75,2569.88 ; R17.1@3125.98,3578.74 3125.98,3558.07 3125,3557.09 3125,3498.03 R16.1@3125.98,3497.05 3125.98,3182.77 3130.67,3178.09 3132.94,3178.09 3152.56,3158.46 C38.2@3152.56,3154.53 3151.57,3154.53 3149.61,3156.5 3139.76,3146.65 C39.2@3139.76,3095.47
  Top Layer w8.03: 3127.95,3095.47 C39.2@3139.76,3095.47
  Top Layer w15.75: v2(3105.32,3009.3) 3105.32,3072.83 3127.95,3095.47
  Inner 1 w8: v2(2664.37,3158.46) 2911.42,3158.46 v2(2914.85,3155.03) ; v2(2787.4,2262.8) 2821.85,2297.24 v2(2821.85,2403.54) ; v2(2796.4,2538.88) 2794.54,2538.88 2794.54,2430.85 v2(2821.85,2403.54) ; v2(3124.02,2317.91) 2907.48,2317.91 v2(2821.85,2403.54) ; v2(3447.83,3157.48) 3447.83,2950.86 3476.38,2922.32 pad.3@3476.38,2913.39 3676.18,3113.19 v2(3676.18,3147.64)
  Inner 1 w13.78: v2(1604.33,3785.43) 1604.33,3784.37 1602.36,3782.4 1602.36,2846.54 1604.33,2844.57 v2(1604.33,2843.5) 1655.51,2792.32 v2(2022.64,2792.32) 2247.05,2567.91 2379.04,2567.91 2381.01,2569.88 v2(2382.08,2569.88)
  Inner 1 w15.75: v2(2529.58,2584.65) 2529.58,2554.08 v2(2541.34,2542.32) 2790.56,2542.32 2794.01,2538.88 2794.54,2538.88 2810.53,2538.88 v2(2867.13,2595.47) 2867.13,2823.82 v2(2922.24,2878.94) ; v2(2876.97,2928.15) 2921.87,2883.25 2921.87,2879.31 v2(2922.24,2878.94) ; v2(3105.32,3009.3) 3105.32,3001.97 2982.28,2878.94 v2(2922.24,2878.94)
  Inner 1 w19.68: v2@3105.32,3001.97 3193.9,2913.39 pad.1@3279.53,2913.39 pad.2@3377.95,2913.39 pad.3@3476.38,2913.39
  Inner 2 w8: v2(2914.85,3155.03) 2911.42,3151.6 2911.42,3116.14 2986.22,3041.34 3073.28,3041.34 v2(3105.32,3009.3)
  Bottom Layer w8: v2(1604.33,3785.43) 1623.09,3804.2 1625.06,3804.2 C7.2@1625.98,3805.12 C6.2@1656.5,3805.12 ; C21.2@2527.56,2604.33 2527.57,2589.29 2529.58,2587.28 v2(2529.58,2584.65) ; v2(2541.34,2542.32) C17.2@2558.07,2542.32 ; X1.1@2724.41,2326.77 X1.4@2724.41,2395.67 2729.33,2395.67 2748.03,2376.97 C14.2@2793.31,2376.97 C22.2@2821.85,2376.97 v2(2821.85,2403.54) ; C18.2@2793.31,2553.15 2794.23,2552.23 2794.23,2543.68 2796.4,2541.51 v2(2796.4,2538.88) ; C20.2@2866.14,2611.22 2866.14,2596.46 v2(2867.13,2595.47) ; v2(2876.97,2928.15) C13.2@2876.97,2947.83 ; C12.2@2878.94,2863.19 2906.5,2863.19 v2(2922.24,2878.94) ; U11.2@3104.33,3030.51 U11.2@3104.33,3052.36 ; U4.6@3351.38,3332.68 3353.35,3332.68 3359.19,3326.83 3359.19,3324.87 3364.99,3319.06 ccw(c3370.63,3324.74) 3366.34,3317.99 3375.96,3311.89 3377.51,3310.91 cw(c3372.97,3263.7) 3395.95,3305.2 3396.65,3304.56 cw(c3391.28,3298.62) 3396.7,3304.51 U4.3@3447.83,3257.87 v2(3447.83,3157.48) ; C1.2@3572.83,3480.32 3601.5,3508.98 ; U3.6@3579.72,3336.61 U3.6@3581.69,3336.61 ; U1.3@3603.54,3543.31 3603.54,3511.02 cw(c3601.5,3511.02) 3601.5,3508.98 ; v2(3676.18,3147.64) U3.3@3676.18,3261.81 3654.53,3261.81 3625.52,3290.82 3625.52,3292.04 3596.51,3321.06 3595.28,3321.06 3587.54,3328.8 3587.54,3330.77 U3.6@3581.69,3336.61 ; U3.6@3581.69,3336.61 3587.54,3342.46 3587.54,3344.43 3601.5,3358.39 3601.5,3508.98
  Bottom Layer w13.78: v2(1604.33,2843.5) 1604.33,2803.15 R4.1@1613.19,2794.29
  Bottom Layer w15.75: R14.1@3080.71,2313.98 3084.65,2317.91 v2(3124.02,2317.91)
  Bottom Layer w19.68: U11.2@3104.33,3030.51 3105.32,3029.53 v2(3105.32,3009.3)
5V: C36.1 C40.2 C41.2 CN23.P CN27.P CN28.2 CN29.2 CN30.1 CN31.1 CN32.1 D1.A D2.K D3.K L2.2 LED1.4 LED2.4 LS1.A R19.2 R25.2 R26.2 U3.4 U4.4 U8.5 U11.3 | length 11572.3
  Top Layer w8: C41.2@3001.97,3155.51 3003.94,3155.51 3021.59,3137.86 3021.59,3127.33 3021.65,3127.27 C40.2@3021.65,3095.47 3020.73,3094.55 3017.42,3094.55 3007.87,3085.01 v2(3007.87,3084.46) ; U8.5@3133.86,3794.88 v2(3133.86,3821.85)
  Top Layer w13.78: v2(1150.59,3781.5) 1185.04,3781.5 1187.01,3779.53 CN30.1@1210.67,3779.53 ; D2.K@2818.9,3624.02 v2(2878.94,3624.02) ; LED1.4@3489.17,3403.54 v2(3492.13,3377.16) ; v2(3853.18,1899.61) CN32.1@3907.44,1899.61
  Top Layer w15.75: LED2.4@3712.6,3402.56 3712.6,3394.68 3714.57,3392.72 v2(3714.57,3364.17)
  Top Layer w78.74: C36.1@3658.19,1805.12 3658.19,1785.43 3675.2,1768.43 L2.2@3675.2,1444.88
  Inner 1 w8: v2(3133.86,3821.85) 3157.48,3798.23 v2(3375.98,3798.23) ; v2(3483.77,1688.5) 3523.14,1688.5 v6(3673.23,1838.58)
  Inner 1 w13.78: CN27.P@1243.11,2863.39 CN27.P@1245.08,2865.35 ; v2(3375.98,3798.23) 3375.98,3797.16 3372.05,3793.23 3372.05,3271.73 3382.87,3260.91 v2@3382.87,3259.84 ; v2(3387.98,3257.87) v2@3387.98,3259.84 ; v2(3492.13,3377.16) 3492.13,3263.29 3495.57,3259.84 ; 3718.5,1909.45 3728.35,1899.61 v2(3853.18,1899.61)
  Inner 1 w15.75: v2(2082.68,3563.98) 2082.68,3261.81 2335.63,3008.86 2999.02,3008.86 3006.56,3001.31 v2(3013.78,2994.09) ; v2(3627.95,3458.66) 3714.19,3372.42 3714.19,3364.55 v2(3714.57,3364.17) 3714.57,3259.84
  Inner 1 w17.72: v2(1150.59,3781.5) 1150.59,3219.49 1245.08,3125 CN29.2@1245.08,3062.99 CN27.P@1245.08,2865.35
  Inner 1 w19.68: v2(2878.94,3624.02) 3243.11,3259.84 ; v2@3013.78,2996.72 3007.87,3002.63 3007.87,3008.86 v2(3007.87,3084.46) 3007.87,3095.47 3172.24,3259.84 3243.11,3259.84 ; CN23.P@3877.95,3055.91 3877.95,3155.51 3773.62,3259.84 3714.57,3259.84 v2(3608.27,3259.84) 3495.57,3259.84 3387.98,3259.84 3382.87,3259.84 3375.98,3259.84 3243.11,3259.84
  Inner 1 w39.37: 1245.08,2417.32 1283.46,2378.94 1468.5,2378.94
  Inner 1 w78.74: CN27.P@1243.11,2863.39 1245.08,2861.42 1245.08,2763.39 1245.08,2663.39 1245.08,2563.39 1245.08,2463.39 1245.08,2417.32 ; 1468.5,2378.94 1487.2,2378.94 2105.32,1760.83 2884.84,1760.83 LS1.A@3044.29,1920.28 3591.54,1920.28 ; CN28.2@3406.89,2183.07 3406.89,2119.68 3598.92,1927.66 v6@3673.23,1853.35 ; v6(3673.23,1838.58) v6@3673.23,1853.35 ; CN23.P@3877.95,3055.91 CN23.P@3877.95,2955.91 CN23.P@3877.95,2855.91 CN23.P@3877.95,2755.91 CN23.P@3877.95,2655.91 CN23.P@3877.95,2555.91 CN23.P@3877.95,2455.91 CN23.P@3877.95,2355.91 3877.95,2068.9 3718.5,1909.45 3673.23,1864.17 v6@3673.23,1853.35
  Bottom Layer w8: R19.2@3460.63,1700.79 v2(3483.77,1688.5)
  Bottom Layer w13.78: D3.K@3342.52,3799.21 3344.49,3799.21 3346.46,3797.24 3347.44,3798.23 v2(3375.98,3798.23) ; U4.4@3351.38,3257.87 3353.35,3259.84 3380.88,3259.84 cw(c3380.88,3246.06) v2(3387.98,3257.87) ; U3.4@3579.72,3261.81 3581.69,3259.84 v2(3608.27,3259.84) ; v2(3853.18,2047.24) CN31.1@3907.44,2047.24
  Bottom Layer w15.75: v2(2082.68,3563.98) R26.2@2082.68,3631.89 2083.66,3632.87 R25.2@2083.66,3715.55 ; v2(3627.95,3458.66) 3657.48,3458.66 3662.4,3453.74 D1.A@3663.39,3453.74
  Bottom Layer w19.68: v2(3013.78,2994.09) 3014.17,2994.49 U11.3@3014.17,3052.36
  Bottom Layer w39.37: CN28.2@3406.89,2183.07 3408.06,2183.07 cw(c3408.06,2179.71) CN28.2@3410.43,2182.09
8V4: C33.2 C34.1 C35.1 L1.2 pad.1@1053.15,1968.5 pad.2@1053.15,1870.08 pad.2@1240.16,2130.91 pad.2@1240.16,2301.18 pad.3@1053.15,1771.65 R20.2 | length 2305.6
  Top Layer w8: C33.2@1207.68,2007.87 v2(1220.47,2007.87)
  Top Layer w39.37: pad.2@1240.16,2295.28 pad.2@1240.16,2301.18
  Top Layer w78.74: pad.1@1053.15,1968.5 1053.15,1970.47 1055.12,1972.44 1055.12,1872.05 pad.2@1053.15,1870.08 pad.3@1053.15,1771.65 1067.64,1771.65 1141.73,1697.56 1179.13,1697.56 1188.98,1687.72 C34.1@1188.98,1650.32 1466.26,1650.32 1591.4,1775.46 1591.4,1886.81 1620.93,1916.34 L1.2@1732.28,1916.34 1732.28,1918.31 1742.13,1928.15 1842.24,1928.15 1859.96,1945.87 C35.1@1859.96,2184.06 C35.1@1897.36,2184.06
  Inner 1 w78.74: pad.2@1053.15,1870.08 1121.06,1870.08 1237.2,1986.22 ; 1237.2,2007.87 1237.2,2298.23 pad.2@1240.16,2301.18
  Bottom Layer w8: pad.2@1240.16,2130.91 1240.16,2121.06 ccw(c1291.34,2121.06) 1291.34,2069.88 1295.28,2069.88 cw(c1295.28,2026.57) 1338.58,2026.57 R20.2@1338.58,1978.35
12V: C27.2 C28.2 C29.1 C30.2 C31.2 C32.2 C42.1 CN10.A CN14.A CN15.A CN16.A CN17.A CN18.A pad.1@1586.61,1070.87 pad.2@1488.19,1070.87 pad.3@1389.76,1070.87 R23.1 U9.5 U10.1 | length 1502.9
  Top Layer w8: 3161.42,1416.19 C32.2@3161.42,1432.09
  Top Layer w9.84: v2(2549.85,1876.44) C29.1@2565.42,1874.48 ; 2686.02,1704.72 2686.02,1706.69
  Top Layer w39.37: C30.2@3065.94,1433.07 3066.93,1433.07 3112.6,1433.07 cw(c3112.6,1336.61) 3113.43,1433.07 cw(c3113.18,1393.7) 3138.61,1423.75 ccw(c3156.5,1444.88) 3154.61,1417.26 cw(c3151.94,1377.98) 3161.42,1416.19 cw(c3151.94,1377.98) 3179.17,1406.42 cw(c3112.6,1336.61) U10.1@3209.06,1336.61 3209.06,1259.84 3208.66,1259.84
  Top Layer w78.74: C29.1@2503.66,1828.74 2503.66,1708.94 ccw(c2586.61,1708.94) 2586.61,1625.98 2675.32,1625.98 cw(c2675.32,1525.98) 2775.32,1525.98 C42.1@2775.32,1453.74 ccw(c2775.32,1355.59) 2677.17,1355.59 CN14.A@2677.17,1102.36 ; C31.2@3065.94,1287.4 ccw(c3065.94,1288.39) 3066.93,1288.39 C30.2@3066.93,1433.07
  Bottom Layer w9.84: v2(2549.85,1876.44) 2565.42,1901.26 ccw(c2557.09,1906.5) 2566.93,1906.5 R23.1@2566.93,1940.94
  Bottom Layer w39.37: R23.1@2566.93,1940.94 ccw(c2569.31,1943.32) 2569.31,1939.96 R23.1@2569.88,1939.96
  other v3: 3021.02,1042.36 3375.35,1042.36 3729.68,1042.36 1968.5,1044.36 2322.83,1044.36 2677.17,1044.36 3046.02,1051.36 3400.35,1051.36 3754.68,1051.36 2992.02,1052.36 3346.35,1052.36 3700.68,1052.36 1993.5,1053.36 2347.83,1053.36 2702.17,1053.36 1939.5,1054.36 2293.83,1054.36 2648.17,1054.36 3065.02,1068.36 3419.35,1068.36 3773.68,1068.36 2012.5,1070.36 2366.83,1070.36 2721.17,1070.36 2973.02,1074.36 3327.35,1074.36 3681.68,1074.36 1920.5,1076.36 2274.83,1076.36 2629.17,1076.36 3073.02,1100.36 3427.35,1100.36 3781.68,1100.36 2020.5,1102.36 2374.83,1102.36 2729.17,1102.36 2970.02,1103.36 3324.35,1103.36 3678.68,1103.36 1917.5,1105.36 2271.83,1105.36 2626.17,1105.36 3067.02,1130.36 3421.35,1130.36 3775.68,1130.36 2978.02,1131.36 3332.35,1131.36 3686.68,1131.36 2014.5,1132.36 2368.83,1132.36 2723.17,1132.36 1925.5,1133.36 2279.83,1133.36 2634.17,1133.36 2997.02,1149.36 3351.35,1149.36 3705.68,1149.36 1944.5,1151.36 2298.83,1151.36 2653.17,1151.36 3022.02,1158.36 3376.35,1158.36 3730.68,1158.36 1969.5,1160.36 2323.83,1160.36 2678.17,1160.36
  other v4: 3049.02,1149.36 3403.35,1149.36 3757.68,1149.36 1996.5,1151.36 2350.83,1151.36 2705.17,1151.36
BOOT0: C23.1 SW3.4 U7.60 | length 581.9
  Top Layer w8: U7.60@2483.72,2647.54 2360.13,2647.54 2333.66,2621.06 2333.66,2589.56 2333.41,2589.3 2333.41,2499.03 2485.19,2347.25 2494.28,2347.25 C23.1@2495.08,2346.46 2514.76,2346.46 2533.53,2365.22 2533.53,2373.09 2543.31,2382.87 SW3.4@2549.21,2382.87
ESP_BOOT: C11.2 Q2.2 SW2.2 U5.25 | length 1056.1
  Top Layer w8: v2(2109.25,2887.8) 2094.49,2873.03 2094.49,2871.98 2084.71,2862.2 2084.71,2827.69 C11.2@2127.95,2784.45 ; v2(2246.06,3024.61) 2275.1,3053.64 U5.25@2275.1,3181.59 ; U5.25@2271.65,3185.04 U5.25@2275.1,3181.59 ; U5.25@2278.54,3178.15 U5.25@2275.1,3181.59 ; v2(2331.69,3213.58) 2331.69,3199.8 2306.1,3174.21 2282.48,3174.21 U5.25@2275.1,3181.59 ; v2(2386.81,3500.98) 2481.8,3595.97 2485.65,3595.97 2497.43,3607.76 Q2.2@2497.43,3611.1
  Inner 1 w8: v2(2109.25,2887.8) v2(2246.06,3024.61)
  Bottom Layer w8: v2(2331.69,3213.58) 2331.69,3445.87 v2(2386.81,3500.98)
ESP_EN: C10.2 Q1.3 SW1.2 U5.3 | length 2388.9
  Top Layer w8: U5.3@1562.99,3735.04 1563.19,3735.24 1666.34,3735.24 ; v2(1708.66,3735.24) 1666.34,3735.24 ; v2(1775.59,2883.86) SW1.2@1775.59,2862.2 1775.59,2821.85 1807.28,2790.17 1807.28,2665.54 C10.2@1794.29,2652.56 ; v2(1803.15,3235.24) 1666.34,3372.05 1666.34,3735.24 ; v2(2413.39,3791.34) 2632.87,3791.34 2666.34,3757.87 2666.34,3680.12 Q1.3@2667.32,3681.1
  Inner 1 w8: v2(1775.59,2883.86) 1777.45,2885.72 1777.45,2891.62 1803.15,2917.32 v2(1803.15,3235.24)
  Bottom Layer w8: v2(1708.66,3735.24) 1764.76,3791.34 v2(2413.39,3791.34)
ESP_IN_INTERRUPT: R7.2 U7.50 | length 207.9
  Top Layer w8: R7.2@2319.88,2944.88 2319.88,2940.95 2339.5,2921.32 2343.44,2921.32 2420.46,2844.3 2483.49,2844.3 U7.50@2483.72,2844.54
ESP_OUT_INTERRUPT: R10.2 U7.53 | length 164.3
  Top Layer w8: R10.2@2319.88,2784.45 2482.64,2784.45 U7.53@2483.72,2785.54
ESP_RX: CN7.1 U5.28 U7.52 | length 776.1
  Top Layer w8: U5.28@2271.65,3335.04 2410.04,3335.04 CN7.1@2413.39,3331.69 2413.39,3334.65 2420.28,3334.65 2448.76,3306.17 2448.76,3299.28 2538.2,3209.83 2538.2,2904.59 2540.72,2902.06 2540.72,2827.44 2520.32,2807.04 2504.92,2807.04 2503.42,2805.54 U7.52@2483.72,2805.54